# EAGLE board Actuator (EAGLE 9.5.1)
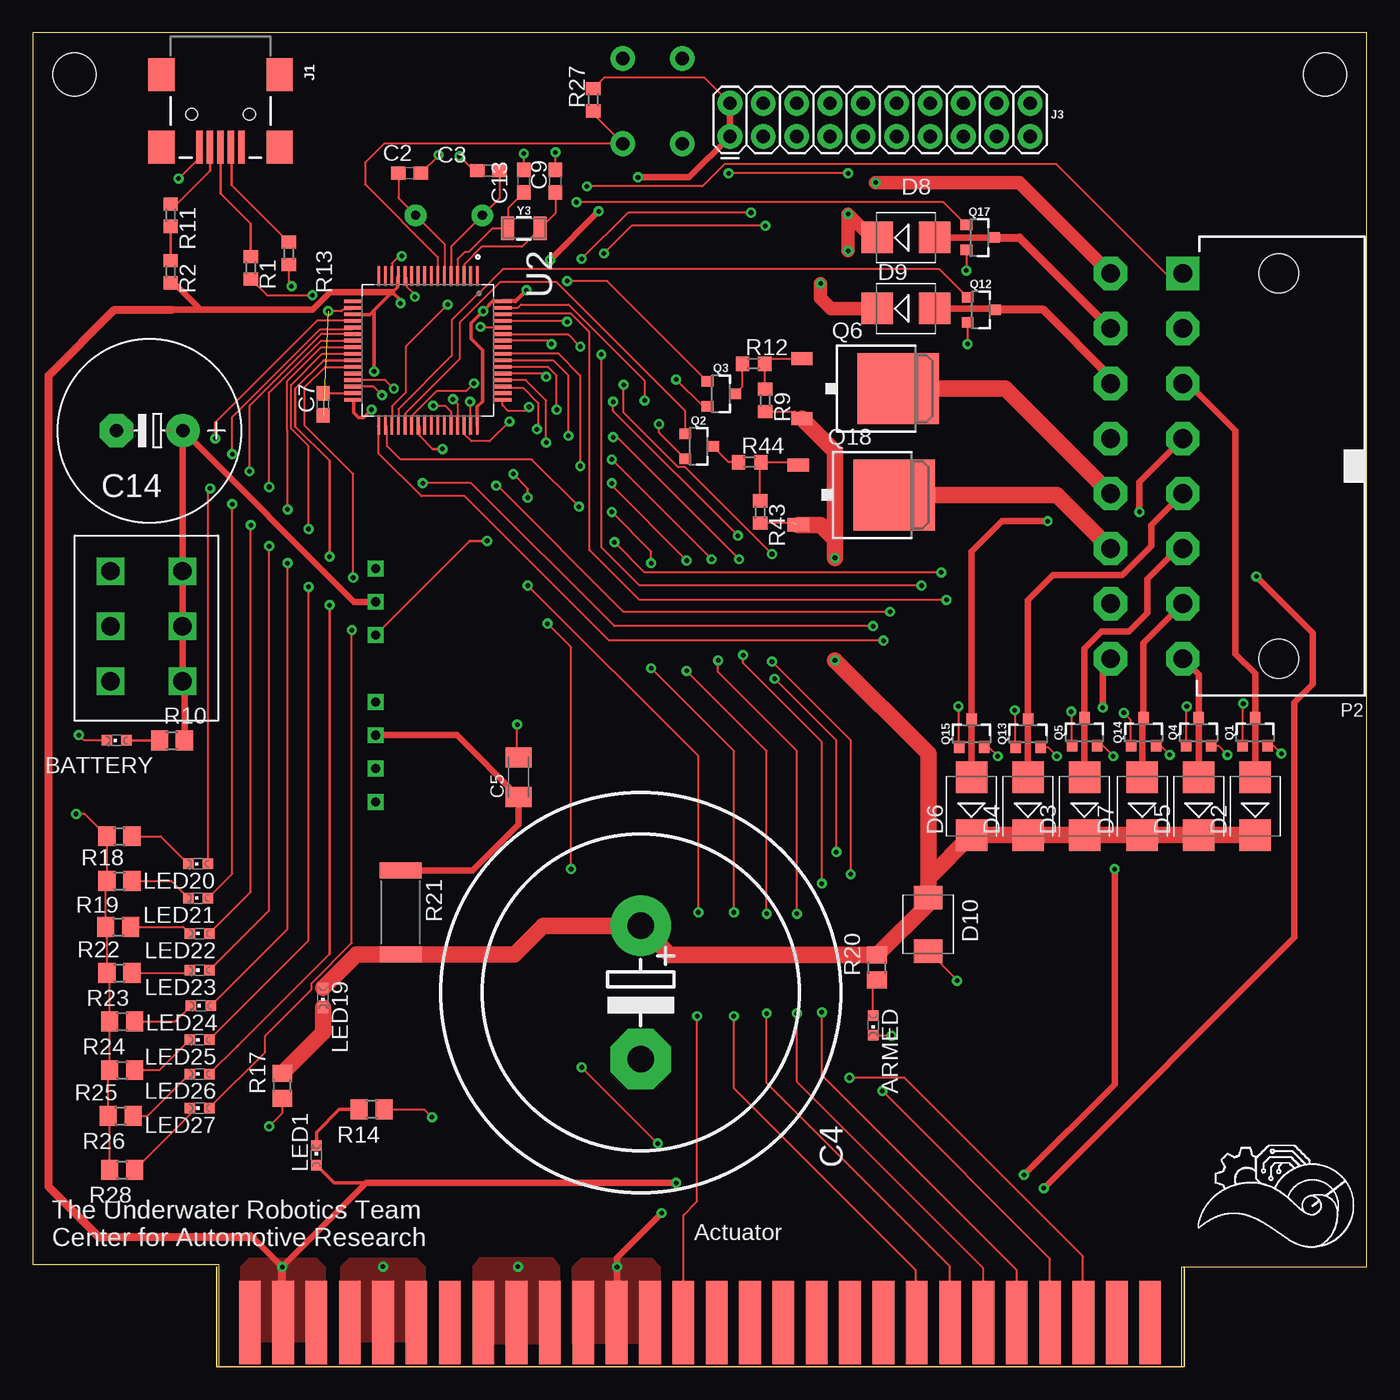
[diagram p0: board, top side]
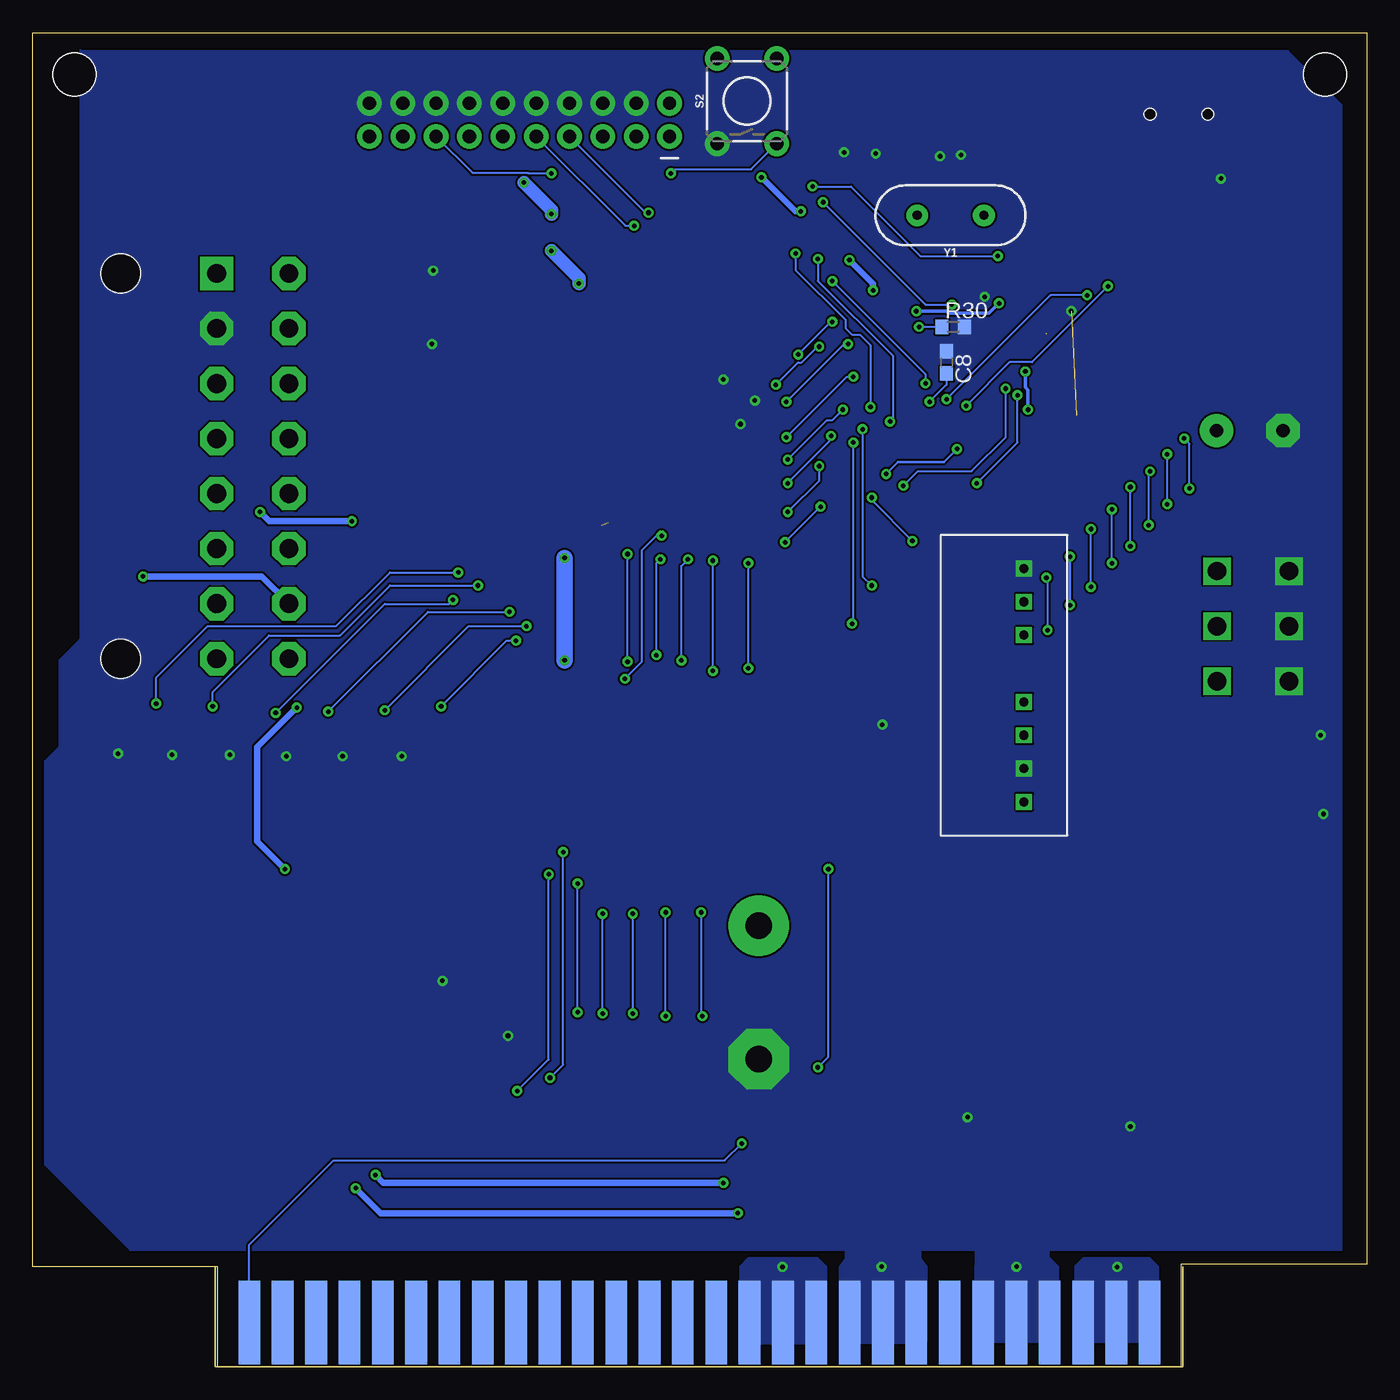
[diagram p1: board, bottom side, seen from below]

Size 101.6 x 101.6 mm. Coordinates in mm from the lower left corner, seen from the top.
Outline: 0,7.8 14.14,7.8 14.14,0 87.53,0 87.53,7.62 101.6,7.62 101.6,101.6 0,101.6 0,7.8
Copper layers (1*16): Top 0.035mm / dielectric 1.5mm / Bottom 0.035mm
Design rules "default *": minimum track width 6mil, minimum drill 0.35mm, track to track 6mil, track to pad 6mil, pad to pad 6mil, via to via 6mil, smd to smd 6mil, copper to edge 0.00508125mm, drill to drill 6mil, minimum pad ring 10mil, minimum via ring 8mil, stop-mask expansion 4mil, vias tented up to drill 0mil, thermal gap 10mil
Holes 3.26 mm at 3.17,98.42 98.42,98.42

## Footprints (pad centres in the part's own frame; a part is rotated, then mirrored left to right if it is on the bottom)
CHIPLED_0603 = smd 0.8 x 0.8: A 0,-0.75; C 0,0.75
C0603 = smd 1.1 x 1: 1 -0.85,0; 2 0.85,0
EB30D = drill 2.007 pad 4.597: + -5.08,0 | drill 2.007 pad 4.597 octagon: - 5.08,0
C1206K = smd 1.5 x 2: 1 -1.5,0; 2 1.5,0
E5-13 = drill 1.016 pad 2.54: + -2.54,0 | drill 1.016 pad 2.54 octagon: - 2.54,0
SMB = smd 2.4 x 2.4: A 2.2,0; C -2.2,0
SMBJ = smd 1.78 x 2.16: A 2.04,0; C -2.03,0
USB-MINIB = smd 2.5 x 0.5: D+ 2.5,0; D- 2.5,0.8; GND 2.5,-1.6; ID 2.5,-0.8; VBUS 2.5,1.6 | smd 2.5 x 2: S1 -3,4.5; S2 2.5,4.5; S3 -3,-4.5; S4 2.5,-4.5 | hole 0.9: 0,2.2; 0,-2.2
2X10 = drill 1.016 pad 1.88: 1 0,0; 2 0,2.54; 3 2.54,0; 4 2.54,2.54; 5 5.08,0; 6 5.08,2.54; 7 7.62,0; 8 7.62,2.54; 9 10.16,0; 10 10.16,2.54; 11 12.7,0; 12 12.7,2.54; 13 15.24,0; 14 15.24,2.54; 15 17.78,0; 16 17.78,2.54; 17 20.32,0; 18 20.32,2.54; 19 22.86,0; 20 22.86,2.54
39-30-?16? = drill 1.422 pad 2.54 square: 1 14.668,0 | drill 1.422 pad 2.54 octagon: 2 10.477,0; 3 6.287,0; 4 2.095,0; 5 -2.095,0; 6 -6.287,0; 7 -10.477,0; 8 -14.668,0; 9 14.668,5.512; 10 10.477,5.512; 11 6.287,5.512; 12 2.095,5.512; 13 -2.095,5.512; 14 -6.287,5.512; 15 -10.477,5.512; 16 -14.668,5.512 | hole 3: -14.668,-7.3; 14.668,-7.3
SOT23-3 = smd 0.8 x 0.9: 1 -0.95,-1; 2 0.95,-1; 3 0,1.1
TO252 = smd 1 x 1.6: 1 -2.28,-4.8; 2 2.28,-4.8 | smd 5.4 x 6.2: 3 0,2.5
R0603 = smd 1 x 1.1: 1 -0.85,0; 2 0.85,0
R0805 = smd 1.3 x 1.5: 1 -0.95,0; 2 0.95,0
R6332W = smd 1.2 x 3.2: 1 -3.196,0; 2 3.196,0
TACTILE_SWITCH_PTH_6.0MM = drill 1.016 pad 1.88: 1 -3.251,2.261; 2 3.251,2.261; 3 -3.251,-2.261; 4 3.251,-2.261
QFP50P1200X1200X160-64N = smd 1.47 x 0.28: 1 -5.67,3.75; 2 -5.67,3.25; 3 -5.67,2.75; 4 -5.67,2.25; 5 -5.67,1.75; 6 -5.67,1.25; 7 -5.67,0.75; 8 -5.67,0.25; 9 -5.67,-0.25; 10 -5.67,-0.75; 11 -5.67,-1.25; 12 -5.67,-1.75; 13 -5.67,-2.25; 14 -5.67,-2.75; 15 -5.67,-3.25; 16 -5.67,-3.75; 33 5.67,-3.75; 34 5.67,-3.25; 35 5.67,-2.75; 36 5.67,-2.25; 37 5.67,-1.75; 38 5.67,-1.25; 39 5.67,-0.75; 40 5.67,-0.25; 41 5.67,0.25; 42 5.67,0.75; 43 5.67,1.25; 44 5.67,1.75; 45 5.67,2.25; 46 5.67,2.75; 47 5.67,3.25; 48 5.67,3.75 | smd 0.28 x 1.47: 17 -3.75,-5.67; 18 -3.25,-5.67; 19 -2.75,-5.67; 20 -2.25,-5.67; 21 -1.75,-5.67; 22 -1.25,-5.67; 23 -0.75,-5.67; 24 -0.25,-5.67; 25 0.25,-5.67; 26 0.75,-5.67; 27 1.25,-5.67; 28 1.75,-5.67; 29 2.25,-5.67; 30 2.75,-5.67; 31 3.25,-5.67; 32 3.75,-5.67; 49 3.75,5.67; 50 3.25,5.67; 51 2.75,5.67; 52 2.25,5.67; 53 1.75,5.67; 54 1.25,5.67; 55 0.75,5.67; 56 0.25,5.67; 57 -0.25,5.67; 58 -0.75,5.67; 59 -1.25,5.67; 60 -1.75,5.67; 61 -2.25,5.67; 62 -2.75,5.67; 63 -3.25,5.67; 64 -3.75,5.67
5530843-6-BOARDFINGERS = smd 1.651 x 6.35 bottom: 1 0.826,3.375; 2 3.365,3.375; 3 5.905,3.375; 4 8.445,3.375; 5 10.986,3.375; 6 13.525,3.375; 7 16.066,3.375; 8 18.605,3.375; 9 21.145,3.375; 10 23.686,3.375; 11 26.226,3.375; 12 28.765,3.375; 13 31.305,3.375; 14 33.846,3.375; 15 36.386,3.375; 16 38.925,3.375; 17 41.465,3.375; 18 44.005,3.375; 19 46.545,3.375; 20 49.086,3.375; 21 51.626,3.375; 22 54.166,3.375; 23 56.706,3.375; 24 59.245,3.375; 25 61.785,3.375; 26 64.326,3.375; 27 66.865,3.375; 28 69.406,3.375 | smd 1.651 x 6.35: 29 69.406,3.375; 30 66.865,3.375; 31 64.326,3.375; 32 61.785,3.375; 33 59.245,3.375; 34 56.706,3.375; 35 54.166,3.375; 36 51.626,3.375; 37 49.086,3.375; 38 46.545,3.375; 39 44.005,3.375; 40 41.465,3.375; 41 38.925,3.375; 42 36.386,3.375; 43 33.846,3.375; 44 31.305,3.375; 45 28.765,3.375; 46 26.226,3.375; 47 23.686,3.375; 48 21.145,3.375; 49 18.605,3.375; 50 16.066,3.375; 51 13.525,3.375; 52 10.986,3.375; 53 8.445,3.375; 54 5.905,3.375; 55 3.365,3.375; 56 0.826,3.375
6PIN_VERT = drill 1.4 square: 1+ 0,0; 1- 5.5,0; 2+ 0,4.2; 2- 5.5,4.2; 3+ 0,8.4; 3- 5.5,8.4
TMR6-2415 = drill 0.7 square: P$1 0,0; P$2 2.54,0; P$3 5.08,0; P$5 10.16,0; P$6 12.7,0; P$7 15.24,0; P$8 17.78,0
HC49US = drill 0.7 pad 1.651: 1 -2.54,0; 2 2.54,0
CRYSTAL-SMD-3.2X1.5MM = smd 1 x 1.8: P$1 -1.25,0; P$2 1.25,0

## Placement (x,y rotation side)
ARMED  [CHIPLED_0603]  64,26 180 top
BATTERY  [CHIPLED_0603]  6.4,47.7 90 top
C2  18pF  [C0603]  28.7,90.9 0 top
C3  18pF  [C0603]  34.7,91.1 180 top
C4  22mF  [EB30D]  46.3,28.5 270 top
C5  47 uF  [C1206K]  37,44.9 90 top
C7  2.2uF  [C0603]  22.1,73.3 90 top
C8  2.2uF  [C0603]  32,76.5 270 bottom
C9  12.5pF  [C0603]  39.8,90.3 90 top
C13  12.5pF  [C0603]  37.4,90.3 90 top
C14  1000 uF  [E5-13]  8.9,71.3 180 top
D2  [SMB]  93.1,42.7 90 top
D3  [SMB]  80.1,42.7 90 top
D4  [SMB]  75.8,42.7 90 top
D5  [SMB]  88.8,42.7 90 top
D6  [SMB]  71.5,42.7 90 top
D7  [SMB]  84.5,42.7 90 top
D8  [SMB]  66.5,86 0 top
D9  [SMB]  66.5,80.6 0 top
D10  [SMBJ]  68.2,33.7 270 top
J1  USB_MINI-B_SMT  [USB-MINIB]  14.3,95.4 270 top
J3  [2X10]  53.1,93.7 0 top
LED1  [CHIPLED_0603]  21.6,16.1 0 top
LED19  [CHIPLED_0603]  22.1,28.1 180 top
LED20  [CHIPLED_0603]  12.6,38.3 90 top
LED21  [CHIPLED_0603]  12.6,35.7 90 top
LED22  [CHIPLED_0603]  12.7,33 90 top
LED23  [CHIPLED_0603]  12.7,30.2 90 top
LED24  [CHIPLED_0603]  12.8,27.5 90 top
LED25  [CHIPLED_0603]  12.7,24.9 90 top
LED26  [CHIPLED_0603]  12.7,22.3 90 top
LED27  [CHIPLED_0603]  12.7,19.7 90 top
P2  39-30-16?  [39-30-?16?]  87.6,68.6 90 top
Q1  [SOT23-3]  93.1,48.3 0 top
Q2  [SOT23-3]  50.7,70.1 270 top
Q3  [SOT23-3]  52.4,74.1 270 top
Q4  [SOT23-3]  88.8,48.3 0 top
Q5  [SOT23-3]  80.1,48.3 0 top
Q6  [TO252]  63.4,74.5 270 top
Q12  [SOT23-3]  72.2,80.5 270 top
Q13  [SOT23-3]  75.8,48.2 0 top
Q14  [SOT23-3]  84.6,48.3 0 top
Q15  [SOT23-3]  71.5,48.2 0 top
Q17  [SOT23-3]  72.1,86 270 top
Q18  [TO252]  63.1,66.4 270 top
R1  22  [R0603]  16.6,83.7 270 top
R2  100k  [R0603]  10.5,83.4 270 top
R9  10k  [R0603]  55.8,73.6 270 top
R10  1.2k  [R0805]  10.6,47.7 0 top
R11  560  [R0603]  10.5,87.7 270 top
R12  10k  [R0603]  54.9,76.4 0 top
R13  22  [R0603]  19.5,84.8 270 top
R14  100  [R0805]  25.8,19.6 180 top
R17  1.5k  [R0805]  19,21.4 90 top
R18  100  [R0805]  6.6,40.4 0 top
R19  100  [R0805]  6.6,37 0 top
R20  1.2k  [R0805]  64.3,30.4 90 top
R21  120  [R6332W]  28,34.6 270 top
R22  100  [R0805]  6.5,33.5 0 top
R23  100  [R0805]  6.6,30 0 top
R24  100  [R0805]  6.8,26.3 0 top
R25  100  [R0805]  6.8,22.6 0 top
R26  100  [R0805]  6.7,19.1 0 top
R27  4.7k  [R0603]  42.7,96.5 90 top
R28  100  [R0805]  6.8,15 0 top
R30  100k  [R0603]  31.5,79.2 0 bottom
R43  10k  [R0603]  55.4,65.1 270 top
R44  10k  [R0603]  54.6,68.9 0 top
S2  MOMENTARY-SWITCH-SPST-PTH-6.0MM  [TACTILE_SWITCH_PTH_6.0MM]  47.2,96.4 90 bottom
U2  STM32F405RGT6  [QFP50P1200X1200X160-64N]  30.1,77.4 270 top
U$1  5530843-EDGE  [5530843-6-BOARDFINGERS]  15.7,0 0 top
U$3  6PIN-VERT  [6PIN_VERT]  11.4,60.6 180 top
U$6  TMR6-2415  [TMR6-2415]  26.1,60.8 270 bottom
Y1  12MHz  [HC49US]  31.7,87.7 180 bottom
Y3  32.768kHz  [CRYSTAL-SMD-3.2X1.5MM]  37.4,86.7 0 top

## Library data of the parts
ARMED BATTERY LED1 LED19-LED27 = led
C2 C3 C7-C9 C13 C14 = rcl; SPICEPREFIX: C
C4 C5 R9 R10 R12 R14 R17-R26 R28 R43 R44 = resistor
D2-D10 = diode
J1 = SparkFun-Connectors; PROD_ID: CONN-08193; SF_ID: PRT-00587
J3 = SparkFun-Connectors
P2 = con-molex-mini-fit
Q1-Q5 Q12-Q15 Q17 = SparkFun-DiscreteSemi; PROD_ID: TRANS-12988
Q6 Q18 = transistor-fet
R1 R2 R11 R13 R27 R30 = rcl; SPICEPREFIX: R
S2 = SparkFun-Switches; PROD_ID: SWCH-08441; SF_SKU: COM-00097
U2 = STM32F405RGT6; AVAILABILITY: Unavailable; DESCRIPTION: High-performance foundation line, ARM Cortex-M4 core with DSP and FPU, 1 Mbyte Flash, 168 MHz CPU, ART Accelerator; MF: STMicroelectronics; MP: STM32F405RGT6; PACKAGE: LQFP-64 STMicroelectronics; PRICE: None
U$1 = 5530843-6
U$3 = Vertical_Connectors
U$6 = converter
Y1 = SparkFun-Clocks; PROD_ID: XTAL-08181; SF_ID: COM-00536
Y3 = SparkFun-Clocks; PROD_ID: XTAL-13062

## Nets
+3V3: J3.1 J3.2 LED1.A P2.16 R2.2 R27.2 U2.13 U2.19 U2.32 U2.48 U2.64 U$1.1 U$1.2 U$1.3 U$1.54 U$1.55 U$1.56
+5V: P2.15 U$1.11 U$1.12 U$1.13 U$1.44 U$1.45 U$1.46
+12V: D8.C D9.C P2.9
+24V: C4.+ D2.C D3.C D4.C D5.C D6.C D7.C D10.C LED19.A Q6.2 Q18.2 R9.2 R20.2 R21.2 R43.2
AGND: ARMED.C BATTERY.C C2.2 C3.2 C4.- C5.2 C7.1 C8.1 C9.2 C13.2 C14.- D10.A J1.GND J3.4 J3.6 J3.8 J3.10 J3.12 J3.14 J3.16 J3.18 J3.20 P2.2 Q1.2 Q2.2 Q3.2 Q4.2 Q5.2 Q12.2 Q13.2 Q14.2 Q15.2 Q17.2 R14.1 R17.1 R18.1 R19.1 R22.1 R23.1 R24.1 R25.1 R26.1 R28.1 R30.2 S2.1 U2.12 U2.18 U2.63 U$1.4 U$1.5 U$1.6 U$1.8 U$1.9 U$1.10 U$1.47 U$1.48 U$1.49 U$1.51 U$1.52 U$1.53 U$3.1- U$3.2- U$3.3- U$6.P$1 U$6.P$7
ARM_TORPEDO: U2.39 U$6.P$3
COIL_1: D5.A P2.8 Q4.3
COIL_1_GATE: Q4.1 U2.61
COIL_2: D7.A P2.7 Q14.3
COIL_2_GATE: Q14.1 U2.62
COIL_3: D3.A P2.6 Q5.3
COIL_3_GATE: Q5.1 U2.29
COIL_4: D4.A P2.5 Q13.3
COIL_4_GATE: Q13.1 U2.30
COIL_5: D6.A P2.4 Q15.3
COIL_5_GATE: Q15.1 U2.33
COIL_S: D2.A P2.3 Q1.3
COIL_S_GATE: Q1.1 U2.34
DROPPER1: D8.A P2.10 Q17.3
DROPPER1_GATE: Q17.1 U2.35
DROPPER2: D9.A P2.11 Q12.3
DROPPER2_GATE: Q12.1 U2.36
EXTRA1: U2.52 U$1.28
EXTRA2: U2.53 U$1.33
EXTRA3: U2.54 U$1.34
EXTRA4: U2.51 U$1.43
EXTRA5: U2.56 U$1.36
EXTRA6: U2.55 U$1.35
LED1: LED20.A U2.20
LED2: LED21.A U2.21
LED3: LED22.A U2.22
LED4: LED23.A U2.23
LED5: LED24.A U2.24
LED6: LED25.A U2.25
LED7: LED26.A U2.26
LED8: LED27.A U2.27
MOBO_SWITCHED: P2.12
N$1: C2.1 U2.6 Y1.1
N$2: C3.1 U2.5 Y1.2
N$3: C8.2 U2.47
N$4: LED1.C R14.2
N$5: C13.1 U2.4 Y3.P$1
N$6: J1.ID R11.1
N$7: J1.D+ R1.1
N$8: J1.D- R13.1
N$9: BATTERY.A R10.1
N$10: ARMED.A R20.1
N$11: C7.2 U2.31
N$14: Q2.3 R44.1
N$15: LED19.C R17.2
N$16: LED20.C R18.2
N$17: LED21.C R19.2
N$18: LED22.C R22.2
N$19: LED23.C R23.2
N$20: Q18.1 R43.1 R44.2
N$21: LED24.C R24.2
N$22: LED25.C R25.2
N$23: LED26.C R26.2
N$24: LED27.C R28.2
N$25: Q6.1 R9.1 R12.2
N$26: C5.1 R21.1 U$6.P$6
N$28: Q3.3 R12.1
N$29: C9.1 U2.3 Y3.P$2
N$30: R30.1 U2.60
PWM_CLAW: P2.1 U2.14
RESET: J3.15 R27.1 S2.3 U2.7
SCL: U2.58 U$1.31
SDA: U2.59 U$1.32
SMBA: U2.57
SWD_CLK: J3.9 U2.49
SWD_IO: J3.7 U2.46
TORPEDO1: P2.14 Q18.3
TORPEDO1_GATE: Q2.1 U2.37
TORPEDO2: P2.13 Q6.3
TORPEDO2_GATE: Q3.1 U2.38
USB_DN: R13.2 U2.44
USB_DP: R1.2 U2.45
USB_ID: R2.1 R11.2
V+: C14.+ R10.2 U$3.1+ U$3.2+ U$3.3+ U$6.P$2
VBAT: U2.1
VBUS: J1.VBUS

## Tracks (layer width: path | path; a pad name or v marks a point on that pad's centre or on a via)
+3V3  (via drill 0.35)
  Top 0.152: R27.2 43.55,98.2 51.14,98.2 J3.2
  Top 0.254: U2.13 27.77,82.99 27.77,82.24 27.38,81.85 | 26.02,80.48 27.38,81.85 | 26.02,80.48 25.68,80.15 U2.19 | 26.02,80.48 26.02,75.81 v26,75.8 | 27.38,81.85 28,81.23 v28,81 | 35.75,81.15 U2.64 35.02,81.15 34.76,80.89 34.76,80.86 v34.3,80.4 33.4,79.5 33.4,78.3 34.26,77.44 34.26,73.53 33.85,73.12 U2.48 | LED1.A 22.95,14 27.2,14 | v25.8,72.9 25.2,72.3 24.8,72.3 24.43,72.67 U2.32
  Top 0.305: v37.6,81.99 36.76,81.15 U2.64
  Top 0.508: v49,14 27.2,14 25.4,14 v19,7.6 16.75,9.85 16.6,10 | v75.5,14.6 82.4,21.5 v82.4,37.9 | v81.5,50.2 81.5,53.34 P2.16 | 10.6,80.5 12.8,80.5 | 12.8,80.5 21.3,80.5 22.65,81.85 27.38,81.85 | 12.8,80.5 10.75,82.55 | J3.2 J3.1 50,90.6 v46.1,90.6 | v43.1,88 v39.4,84.3
  Top 0.61: U$1.2 19,3.44 v19,7.6 | 10.75,82.55 R2.2 | 16.75,9.85 5.05,9.85 1.2,13.7 1.2,75.5 6.2,80.5 10.6,80.5
  Bottom 0.254: v26,75.8 26,74.6 25.8,74.4 v25.8,72.9 | v34.3,80.4 32.03,80.4 31.87,80.24 28.76,80.24 v28,81
  Bottom 0.508: v49,14 74.9,14 v75.5,14.6 | v82.4,37.9 84.5,40 84.5,47.2 v81.5,50.2 | v46.1,90.6 43.5,88 v43.1,88 | v39.4,84.3 37.6,82.5 v37.6,81.99
  pour Bottom (no thermals): 15.88,7.62 16.51,8.26 21.59,8.26 22.23,7.62 22.23,1.91 15.88,1.91
  pour Top (no thermals): 15.88,7.62 16.51,8.26 21.59,8.26 22.23,7.62 22.23,1.91 15.88,1.91
+5V  (via drill 0.35)
  Top 0.508: v93.2,60.2 97.5,55.9 97.5,52 96.1,50.6 96.1,32.7 v77,13.6 | v47.9,11.7 44.5,8.3 v44.5,7.6 44.5,6.2
  Bottom 0.508: P2.15 84.17,60.2 v93.2,60.2 | v77,13.6 75.1,11.7 v47.9,11.7
  pour Top (no thermals): 41.15,1.78 41.15,7.62 41.78,8.26 47.12,8.26 47.75,7.62 47.75,1.78
  pour Bottom (no thermals): 41.15,1.78 41.15,7.62 41.78,8.26 47.12,8.26 47.75,7.62 47.75,1.78
+12V  (via drill 0.35)
  Top 1.016: P2.9 75.16,90.2 v64.2,90.2 | D8.C 63.9,86 v62.1,87.8 v62.1,85 | v60,82.5 60,81.4 60.8,80.6 D9.C
  Bottom 1.016: v64.2,90.2 62.1,88.1 v62.1,87.8 | v62.1,85 60,82.9 v60,82.5
+24V  (via drill 0.35)  (1 unrouted)
  Top 0.152: R43.2 55.45,64.3 57.8,64.3 | R9.2 58.07,72.75 Q6.2
  Top 1.27: D2.C D5.C D7.C D3.C D4.C D6.C 68.2,37.2 D10.C | D10.C 68.2,35.25 R20.2 48.53,31.35 C4.+ 38.88,33.58 36.7,31.4 R21.2 24.65,31.4 LED19.A | v61.1,53.8 68.2,46.7 D10.C | v61.1,61.6 61.1,63 | 61.1,63 61.1,69.72 Q6.2 | 61.1,63 59.98,64.12 Q18.2
  Bottom 1.27: v61.1,53.8 v61.1,61.6
AGND  (via drill 0.35)  (1 unrouted)
  Top 0.152: 12.6,93 J1.GND 12.7,92.1 v11.1,90.5 | R14.1 29.8,19.6 v30.4,19 | R28.1 5.85,19 R26.1 5.75,22.5 R25.1 R24.1 5.85,29.8 R23.1 5.65,33.4 R22.1 5.55,36.9 R19.1 R18.1 3.95,42.1 v3.3,42.1 | ARMED.C 65.35,25.25 v65.4,25.2 | D10.A 70.4,29.46 v70.4,29.4 | R17.1 19,19.3 v18,18.3 | U2.63 36.95,80.65 37.2,80.9 40.8,80.9 46.6,75.1 v46.6,73.6 | Q17.2 v71.1,83.5 | Q12.2 v71.2,77.9 | Q2.2 47.7,71.15 v47.7,71.8 | Q3.2 51.05,73.15 v49,75.2 | Q15.2 72.8,47.2 v73.5,46.5 | Q13.2 77.3,47.2 v78,46.5 | Q5.2 81.5,47.3 v82.3,46.5 | Q14.2 85.9,47.3 v86.6,46.6 | Q4.2 90.3,47.3 v91,46.6 | Q1.2 94.5,47.3 v95.1,46.7 | U2.12 28.48,82.94 28.48,82.26 29.1,81.64 v29.1,81.5 | U2.18 24.3,80.52 23.62,80.52 23.5,80.4 v22.5,80.4 | C5.2 36.9,46.5 v36.9,48.9 | C13.2 v37.4,92.4 | C9.2 v39.8,92.5 | C3.2 33.6,91.1 v32.5,92.2 | C2.2 30.9,92.25 v30.9,92.3 | BATTERY.C 3.9,47.7 v3.5,48.1
  other vias: 26.67,7.62 36.96,7.62
  pour Bottom (no thermals): 1.9,8.9 1.9,96.1 6,100.2 97.9,100.2 98,100.3 98,55.4 99.6,53.8 99.6,47.2 100.7,46.1 100.7,15.4 94.2,8.9
  pour Top (no thermals): 23.5,7.62 24.13,8.26 29.21,8.26 29.84,7.62 29.84,1.91 23.5,1.91
  pour Bottom (no thermals): 23.5,7.62 24.13,8.26 29.21,8.26 29.84,7.62 29.84,1.91 23.5,1.91
  pour Top (no thermals): 33.66,1.78 40.13,1.78 40.13,7.62 39.62,8.26 34.04,8.26 33.53,7.62 33.53,1.91
  pour Bottom (no thermals): 33.53,7.62 33.53,1.91 33.66,1.78 40.01,1.78 40.01,4.06 40.01,5.71 40.13,5.84 40.13,7.62 39.62,8.26 34.04,8.26
  pour Bottom: 23.6,10 29.7,10 29.8,9.9 29.8,7.5 29.6,7.3 24.3,7.3 24.2,7.4 24.2,9.5 23.8,9.9 23.7,9.9
  pour Bottom: 34,7.2 34,10.1 39.6,10.1 39.7,10 39.7,7.3 39.6,7.2
ARM_TORPEDO  (via drill 0.35)
  Top 0.2: U$6.P$3 33.28,62.9 v34.6,62.9 | v37.7,66.2 37.7,66.9 v36.6,68 | U2.39 29.46,71.62 29.46,70.91 30.47,69.9 v31.2,69.9
  Bottom 0.2: v34.6,62.9 37.7,66 v37.7,66.2 | v36.6,68 35.7,68.9 32.2,68.9 v31.2,69.9
COIL_1
  Top 0.508: D5.A Q4.3 88.8,52.73 P2.8
COIL_1_GATE  (via drill 0.35)
  Top 0.152: Q4.1 87.85,50.25 v87.9,50.3 | v67.7,59.5 46.2,59.5 43.3,62.4 v43.3,77.1 | v40.7,79.59 40.64,79.65 U2.61
  Bottom 0.152: v87.9,50.3 87.9,51.4 83.6,55.7 78.2,55.7 74.4,59.5 v67.7,59.5 | v43.3,77.1 40.81,79.59 v40.7,79.59
COIL_2
  Top 0.508: D7.A 84.5,49.3 Q14.3 84.6,55.12 P2.7
COIL_2_GATE  (via drill 0.35)
  Top 0.152: Q14.1 83.65,49.25 v83.1,49.8 | v69.6,58.4 46.2,58.4 42.4,62.2 42.4,78.8 41,80.2 35.82,80.2 U2.62
  Bottom 0.152: v83.1,49.8 74.8,58.1 69.9,58.1 v69.6,58.4
COIL_3
  Top 0.508: D3.A Q5.3 80.1,54.7 81.4,56 83.5,56 84.9,57.4 84.9,60 87.21,62.31 P2.6
COIL_3_GATE  (via drill 0.35)
  Top 0.152: Q5.1 79.15,49.85 v79.1,49.9 | v65.3,57.5 45,57.5 35.4,67.1 v35.3,67.1 | v27.5,74.5 26.85,75.15 U2.29
  Bottom 0.152: v65.3,57.5 71.5,57.5 v79.1,49.9 | v35.3,67.1 34.2,68.2 30.1,68.2 27.5,70.8 v27.5,74.5
COIL_4
  Top 0.508: D4.A Q13.3 75.8,58.4 75.95,58.55 | P2.5 85.2,64.11 85.2,62.5 83,60.3 77.7,60.3 75.95,58.55 | 75.95,58.55
COIL_4_GATE  (via drill 0.35)
  Top 0.152: Q13.1 74.85,49.95 v74.8,50 | v64,56.4 44.3,56.4 33.4,67.3 v29.7,67.3 | v26.6,74 25.95,74.65 U2.30
  Bottom 0.152: v64,56.4 68.4,56.4 v74.8,50 | v29.7,67.3 26.6,70.4 v26.6,74
COIL_5  (via drill 0.35)
  Top 0.508: D6.A Q15.3 71.5,62.1 73.8,64.4 v77.3,64.4 | P2.4 84.3,67.39 v84.3,65.1
  Bottom 0.508: v84.3,65.1 83.6,64.4 v77.3,64.4
COIL_5_GATE  (via drill 0.35)
  Top 0.152: Q15.1 70.55,50.25 v70.5,50.3 | 26.3,71.68 U2.33 26.35,69.55 29.6,66.3 32.9,66.3 43.9,55.3 v64.8,55.3
  Bottom 0.152: v64.8,55.3 65.5,55.3 v70.5,50.3
COIL_S
  Top 0.508: D2.A Q1.3 93.1,52.8 91.6,54.3 91.6,71.3 88.01,74.89 P2.3
COIL_S_GATE  (via drill 0.35)
  Top 0.152: Q1.1 92.15,50.45 v92.2,50.5 | U2.34 26.98,71.6 26.98,70.12 28,69.1 38,69.1 v41.6,65.5 | v69.2,60.5 46.6,60.5 v44.3,62.8
  Bottom 0.152: v92.2,50.5 92.2,52.5 88.3,56.4 78.5,56.4 74.4,60.5 v69.2,60.5 | v44.3,62.8 v41.6,65.5
DROPPER1
  Top 0.152: 68.72,85.98 D8.A
  Top 0.508: D8.A Q17.3
  Top 0.61: Q17.3 75.17,86 P2.10
DROPPER1_GATE  (via drill 0.35)
  Top 0.152: 71.35,86.7 Q17.1 69.35,88.7 v41.4,88.7 | v31.6,80.9 28.4,77.7 28.4,74.2 27.35,73.15 U2.35
  Bottom 0.152: v41.4,88.7 33.6,80.9 v31.6,80.9
DROPPER2
  Top 0.152: 68.71,80.59 D9.A
  Top 0.508: D9.A 73.2,80.6 Q12.3
  Top 0.61: P2.11 82.09,75.39 76.97,80.5 Q12.3
DROPPER2_GATE
  Top 0.152: Q12.1 69.05,83.6 35.8,83.6 31.9,79.7 31.9,77 27.85,72.95 U2.36
EXTRA1  (via drill 0.35)
  Top 0.152: v41,37.9 41,54.8 v39.2,56.6 | v39.1,70.4 39.1,73.6 37.55,75.15 U2.52 | v47.6,17 v41.8,22.8
  Bottom 0.152: U$1.28 85.11,9.29 78.7,15.7 48.9,15.7 v47.6,17 | v41,37.9 41,23.6 v41.8,22.8 | v39.2,56.6 39.1,56.7 v39.1,70.4
EXTRA2  (via drill 0.35)
  Top 0.152: U$1.33 74.94,7.35 60.1,22.2 v60.1,27 | v60.1,36.8 60.1,47.6 54.1,53.6 v54.1,54.2 | v39.1,75.4 38.85,75.65 U2.53 | v53.8,61.5 44.5,70.8 v44.2,70.8
  Bottom 0.152: v60.1,27 v60.1,36.8 | v53.8,61.5 54.1,61.2 v54.1,54.2 | v44.2,70.8 39.6,75.4 v39.1,75.4
EXTRA3  (via drill 0.35)
  Top 0.152: U$1.34 72.41,7.5 58.2,21.7 v58.2,26.9 | v58.2,34.5 58.2,46.9 52.2,52.9 v52.2,53.8 | v39.9,72.9 39.9,75.5 39.25,76.15 U2.54 | v51.7,61.5 v44.1,69.1
  Bottom 0.152: v58.2,26.9 v58.2,34.5 | v51.7,61.5 52.2,61 v52.2,53.8 | v44.1,69.1 41.1,72.1 40.7,72.1 v39.9,72.9
EXTRA4  (via drill 0.35)
  Top 0.152: U$1.43 49.55,11.55 50.6,12.6 v50.6,26.7 | v50.7,34.6 50.7,46.5 v37.7,59.5 | U2.51 35.9,74.52 37.38,74.52 38.5,73.4 38.5,71.5 v38.4,71.4
  Bottom 0.152: v50.7,34.6 50.7,26.8 v50.6,26.7 | v37.7,59.5 38.4,60.2 v38.4,71.4
EXTRA5  (via drill 0.35)
  Top 0.152: U$1.36 67.22,3.48 67.22,7.38 53.4,21.2 v53.4,26.7 | v53.4,34.6 53.4,46.9 v47.1,53.2 | v41.7,68.6 41.7,75.5 40.05,77.15 U2.56 | v47.1,61.2 47.1,62.1 v44.1,65.1
  Bottom 0.152: v53.4,26.7 v53.4,34.6 | v47.1,53.2 v47.1,61.2 | v44.1,65.1 41.7,67.5 v41.7,68.6
EXTRA6  (via drill 0.35)
  Top 0.152: U$1.35 69.86,7.63 55.9,21.6 v55.9,26.9 | v55.9,34.5 55.9,46.9 v49.8,53 | v40.8,70.9 40.8,75.5 39.65,76.65 U2.55 | v49.8,61.4 44.1,67.1 v44.1,67.3
  Bottom 0.152: v55.9,26.9 v55.9,34.5 | v49.8,53 v49.8,61.4 | v44.1,67.3 40.8,70.6 v40.8,70.9
LED1  (via drill 0.35)
  Top 0.152: 13.45,38.4 LED20.A 13.35,66.75 v13.5,66.9 | v13.9,70.7 13.9,71.9 21.7,79.7 24.38,79.7 U2.20
  Bottom 0.152: v13.5,66.9 13.5,70.3 v13.9,70.7
LED2  (via drill 0.35)
  Top 0.152: LED21.A 15.2,37.55 v15.2,65.7 | U2.21 24.3,79.02 21.89,79.02 15.2,72.33 v15.2,69.5
  Bottom 0.152: v15.2,65.7 v15.2,69.5
LED3  (via drill 0.35)  (1 unrouted)
  Top 0.152: LED22.A 16.6,36.15 v16.6,64.1 | v16.5,68.2 16.5,73.2 22,78.7 24.38,78.7
  Bottom 0.152: v16.6,64.1 16.6,68.1 v16.5,68.2
LED4  (via drill 0.35)
  Top 0.152: LED23.A 18,34.75 v18,62.5 | v18,67 18,74.2 21.95,78.15 U2.23
  Bottom 0.152: v18,62.5 v18,67
LED5  (via drill 0.35)
  Top 0.152: LED24.A 19.4,33.35 v19.4,61.2 | v19.4,65.3 19.4,71.3 19.37,71.34 19.37,75.07 21.95,77.65 U2.24
  Bottom 0.152: v19.4,61.2 v19.4,65.3
LED6  (via drill 0.35)
  Top 0.152: 24.38,77.2 U2.25 22.05,77.15 19.67,74.77 19.67,71.46 21,70.14 v21,63.8 | LED25.A 21,32.45 v21,59.4
  Bottom 0.152: v21,59.4 v21,63.8
LED7  (via drill 0.35)
  Top 0.152: LED26.A 15.6,24.45
  Top 0.2: 15.6,24.45 22.6,31.45 v22.6,58 | v22.6,61.7 22.6,69 20,71.6 20,74.5 22.15,76.65 U2.26
  Bottom 0.2: v22.6,58 v22.6,61.7
LED8  (via drill 0.35)
  Top 0.152: 24.38,76.2 U2.27 22.25,76.15 20.7,74.6 20.7,71.7 24.4,68 v24.4,60.1 | v24.3,56.1 24.3,32.27 21.24,29.21 21.24,28.74 17.7,25.2 17.7,23.95 LED27.A
  Bottom 0.152: v24.3,56.1 24.3,60 v24.4,60.1
N$1
  Top 0.152: C2.1 27.85,89.01 Y1.1 31.35,85.51 U2.6
N$2
  Top 0.152: C3.1 35.55,89.01 Y1.2 31.85,85.31 U2.5
N$3  (via drill 0.35)
  Top 0.152: v33.3,73.5 33.3,71.78 U2.47
  Bottom 0.152: C8.2 32,74.8 v33.3,73.5
N$4
  Top 0.254: LED1.C 21.6,17.85 23.35,19.6 R14.2
N$5
  Top 0.152: Y3.P$1 36.1,86.7 | 36.1,86.7 35,86.7 33.2,84.9 32.9,84.9 32.35,84.35 U2.4 | C13.1 36.2,88.25 36.2,86.8 36.1,86.7
N$6
  Top 0.2: R11.1 10.95,88.55 13.5,91.1 J1.ID
N$7
  Top 0.2: J1.D+ 14.3,89.35 16.6,87.05 R1.1
N$8
  Top 0.2: R13.1 15.15,90 15.15,92.85 J1.D-
N$9
  Top 0.2: BATTERY.A R10.1
N$10
  Top 0.152: ARMED.A 64,29.15 R20.1
N$11
  Top 0.152: C7.2 U2.31
N$14
  Top 0.152: R44.1 53,68.9 Q2.3
N$15
  Top 1.27: R17.2 22.1,25.45 LED19.C
N$16
  Top 0.152: R18.2 9.75,40.4 LED20.C
N$17
  Top 0.152: R19.2 10.55,37 LED21.C
N$18
  Top 0.152: R22.2 11.45,33.5 LED22.C
N$19
  Top 0.152: R23.2 11.75,30 LED23.C
N$20
  Top 0.152: R43.1 55.4,68.85 R44.2 58.08,68.9 Q18.1
N$21
  Top 0.152: R24.2 10.85,26.3 LED24.C
N$22
  Top 0.152: R25.2 9.65,22.6 LED25.C
N$23
  Top 0.152: R26.2 8.75,19.1 LED26.C
N$24
  Top 0.152: R28.2 11.95,19.2 LED27.C
N$25
  Top 0.152: R9.1 55.75,74.5 R12.2 56.13,76.78 Q6.1
N$26
  Top 0.508: R21.1 33.5,37.8 37,41.3 C5.1 32.3,48.1 U$6.P$6
N$28
  Top 0.152: Q3.3 54.05,74.65 R12.1
N$29
  Top 0.152: U2.3 32.85,83.95 34.2,85.3 37.25,85.3 Y3.P$2 39.8,87.85 C9.1
N$30  (via drill 0.35)
  Top 0.152: v34.1,79.2 35.72,79.2 U2.60
  Bottom 0.152: R30.1 v34.1,79.2
PWM_CLAW  (via drill 0.35)
  Top 0.152: P2.1 86.3,83.27 77.97,91.6 52.7,91.6 51,89.9 v42.2,89.9 | v28.1,84.6 27.9,84.6 27.35,84.05 U2.14
  Bottom 0.152: v42.2,89.9 42.2,89.88 39.28,89.88 34,84.6 v28.1,84.6
RESET  (via drill 0.35)
  Top 0.152: S2.3 44.79,93.3 | v62.1,90.9 v53,90.9 | R27.1 42.7,95.39 S2.3 | S2.3 26.75,93.15 25.3,91.7 25.3,90.07 30.85,84.52 U2.7
  Bottom 0.152: v62.1,90.9 63.86,90.9 63.9,90.94 68.12,90.94 J3.15 | v53,90.9 52.7,91.2 46.89,91.2 S2.3
SCL  (via drill 0.35)
  Top 0.152: U$1.31 80,3.4 80,8.4 66.4,22 v62.2,22 | v61.2,39.2 61.2,47.7 v56.5,52.4 | v39.5,77.9 39.25,78.15 U2.58 | v53.7,63.3 44.2,72.8 v44.2,73.5
  Bottom 0.152: v62.2,22 61.2,23 v61.2,39.2 | v56.5,52.4 55.2,53.7 55.2,62.2 54.1,63.3 v53.7,63.3 | v44.2,73.5 39.8,77.9 v39.5,77.9
SDA  (via drill 0.35)
  Top 0.152: U2.59 35.82,78.6 40.8,78.6 v41.7,77.7 | U$1.32 77.49,8.21 v64.7,21 | v62.3,37.5 62.3,47.7 v56.3,53.7 | v56.3,61.9 49.68,68.52 49.16,68.52 45,72.68 v45,74.8
  Bottom 0.152: v64.7,21 62.3,23.4 v62.3,37.5 | v56.3,53.7 v56.3,61.9 | v45,74.8 43.31,76.49 43.05,76.49 41.84,77.7 v41.7,77.7
SWD_CLK  (via drill 0.35)
  Top 0.152: v37.8,73.1 37.5,72.8 36.2,72.8 35.77,73.23 U2.49 | v55.8,86.9 45.6,86.9 v43.5,84.8
  Bottom 0.152: v37.8,73.1 37.8,77.8 38.6,78.6 39.2,78.6 39.7,79.1 39.7,79.74 43.5,83.54 v43.5,84.8 | J3.9 56.46,86.9 v55.8,86.9
SWD_IO  (via drill 0.35)
  Top 0.152: v36.3,72 34.8,70.5 33.4,70.5 32.85,71.05 U2.46 | v54.7,87.9 45.32,87.9 v41.8,84.38
  Bottom 0.152: v41.8,84.38 41.8,82.7 36.1,77 36.1,72.2 v36.3,72 | J3.7 54.92,87.9 v54.7,87.9
TORPEDO1
  Top 1.27: P2.14 78,66.4 Q18.3
TORPEDO1_GATE
  Top 0.152: Q2.1 49.7,72.8 39.9,82.6 35.6,82.6 32.51,79.51 32.51,76.75 28.35,72.59 U2.37
TORPEDO2
  Top 1.27: P2.13 74.09,74.5 Q6.3
TORPEDO2_GATE  (via drill 0.35)
  Top 0.152: Q3.1 43.75,82.7 v40.7,82.7 | v33.6,74.9 33,74.3 30.74,74.3 28.85,72.41 U2.38
  Bottom 0.152: v40.7,82.7 33.6,75.6 v33.6,74.9
USB_DN  (via drill 0.35)
  Top 0.152: 19.9,83.55 R13.2 19.5,82.5 v19.7,82.3 | v30.5,73.2 31.4,73.2 31.85,72.75 U2.44
  Bottom 0.152: v30.5,73.2 27.2,76.5 25.5,76.5 v19.7,82.3
USB_DP  (via drill 0.35)
  Top 0.152: R1.2 17.84,81.61 v21.3,81.61 | v32,73.69 32.35,73.34 U2.45
  Bottom 0.152: v21.3,81.61 24.09,81.61 v32,73.69
USB_ID
  Top 0.2: R11.2 R2.1
V+
  Top 0.508: U$6.P$2 24.48,58.26 C14.+ 11.4,71.26 U$3.1+ U$3.2+ U$3.3+ 11.55,52.05 R10.2

## Text on the board
tPlace: Actuator | The Underwater Robotics Team / Center for Automotive Research